# Altium PCB zb.PcbDoc
Units mm, origin at the board's own origin, x right, y up, seen from the top; angles counter-clockwise.
Board outline 100 x 74.47 mm, 5 copper layers (Top Layer, Mid-Layer 6, Mid-Layer 8, Mid-Layer 14, Bottom Layer); 42 components, 36 nets, 150 pads, 27 vias.
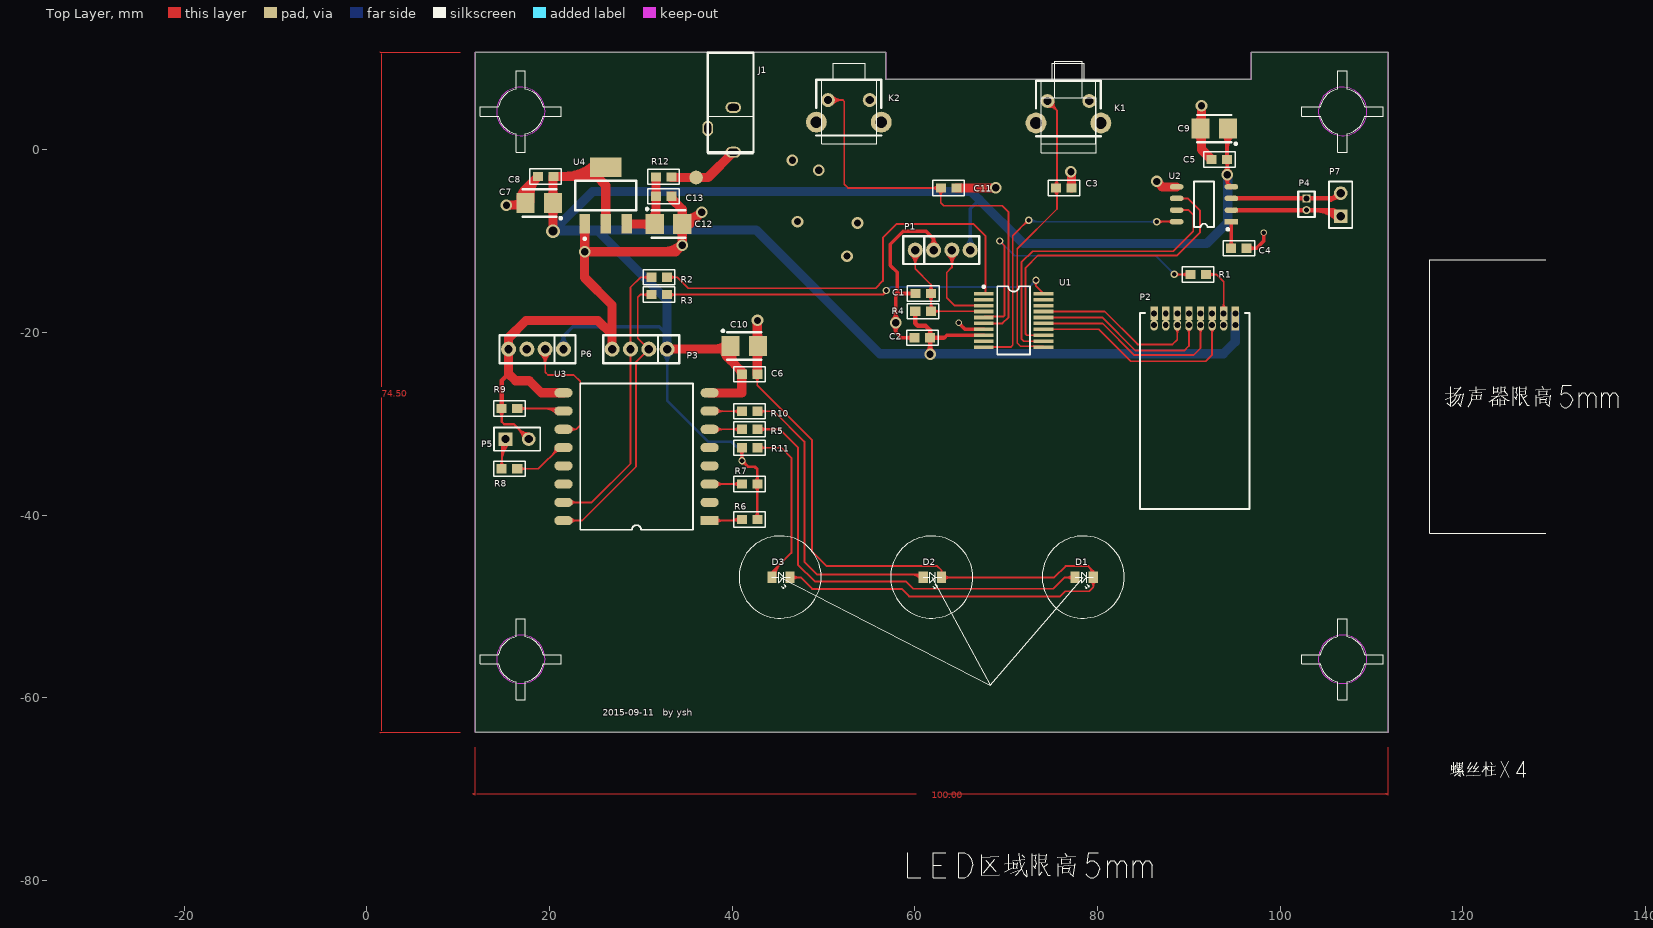
[diagram p0: Top Layer view]
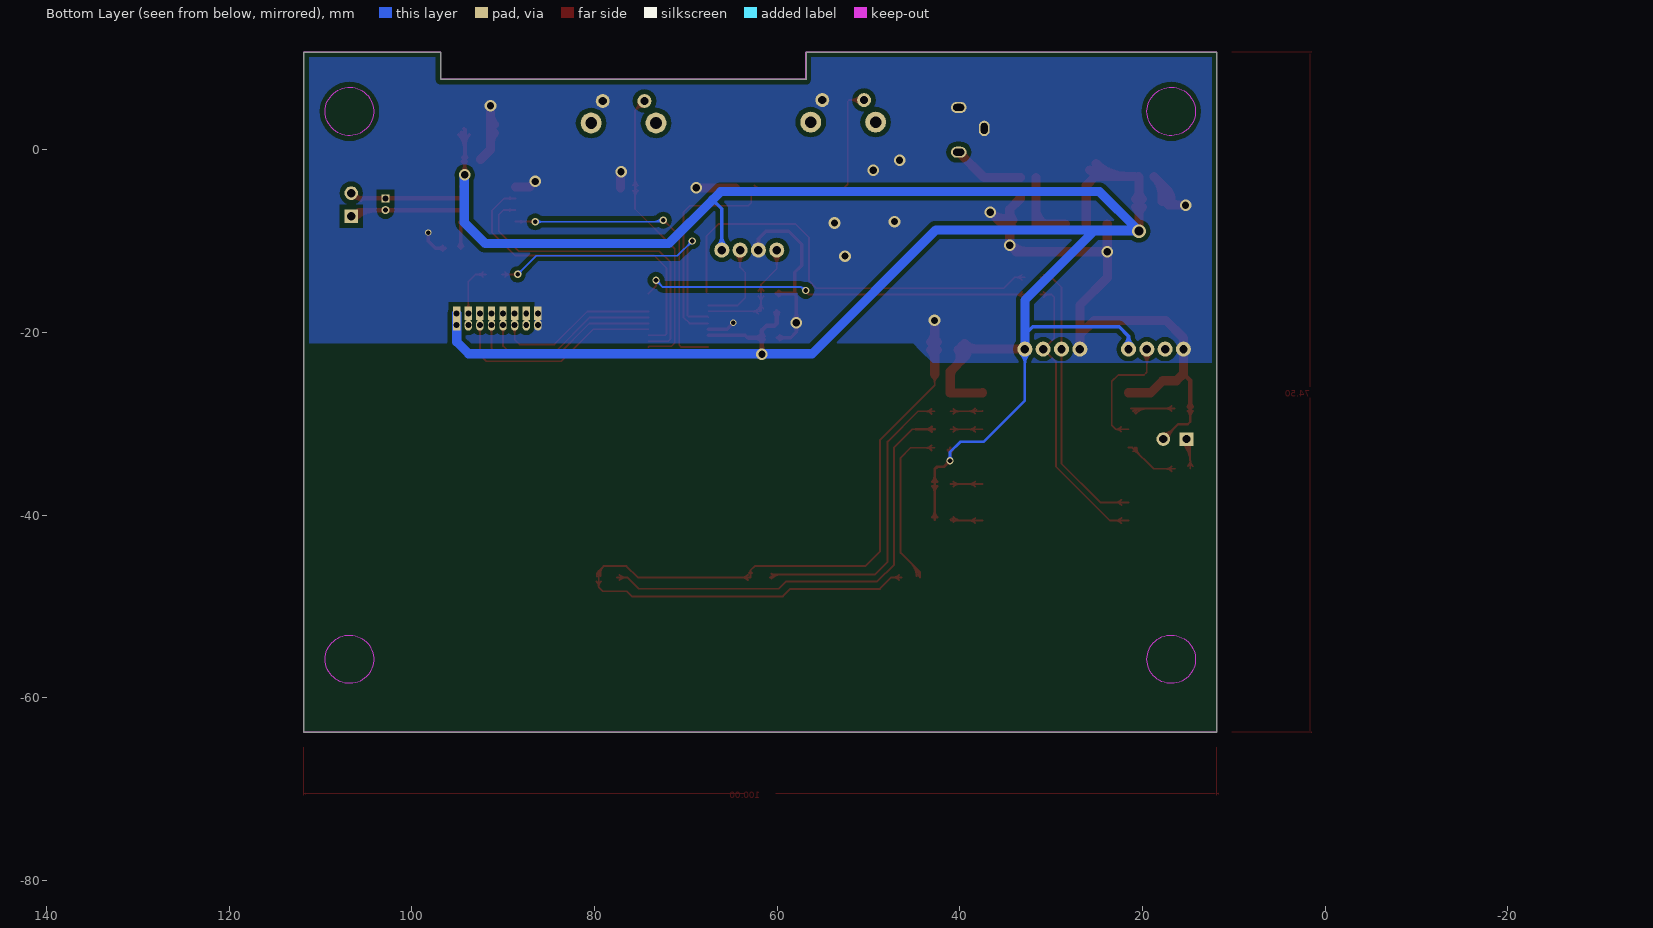
[diagram p1: Bottom Layer view, seen from below]
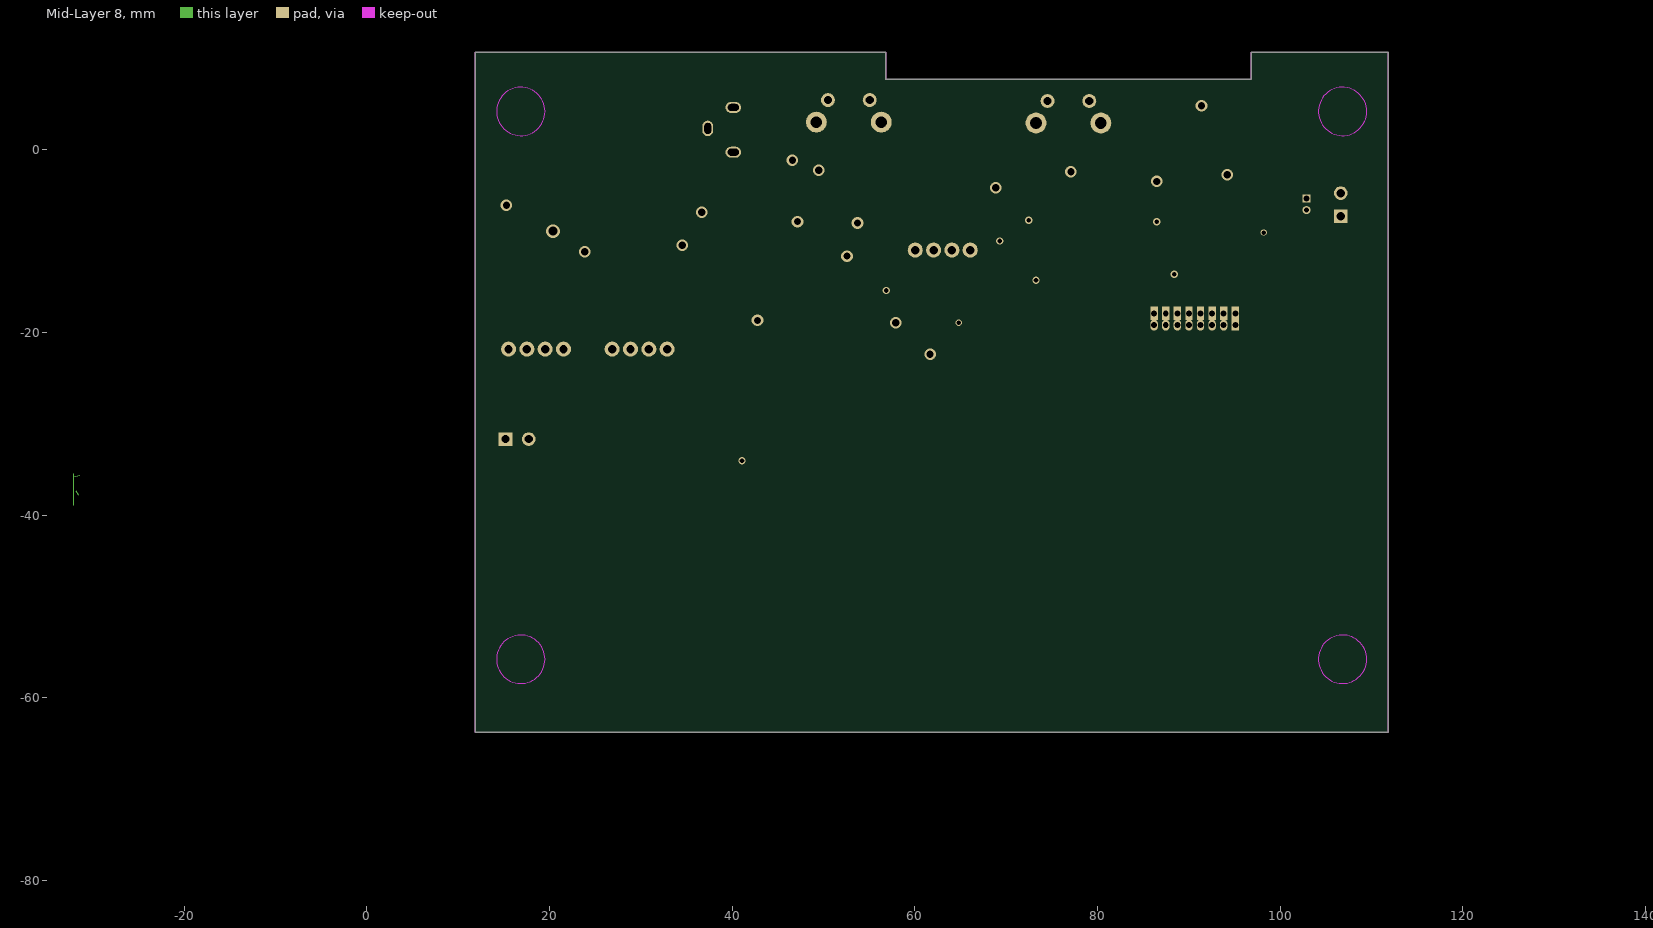
[diagram p2: Mid-Layer 8]
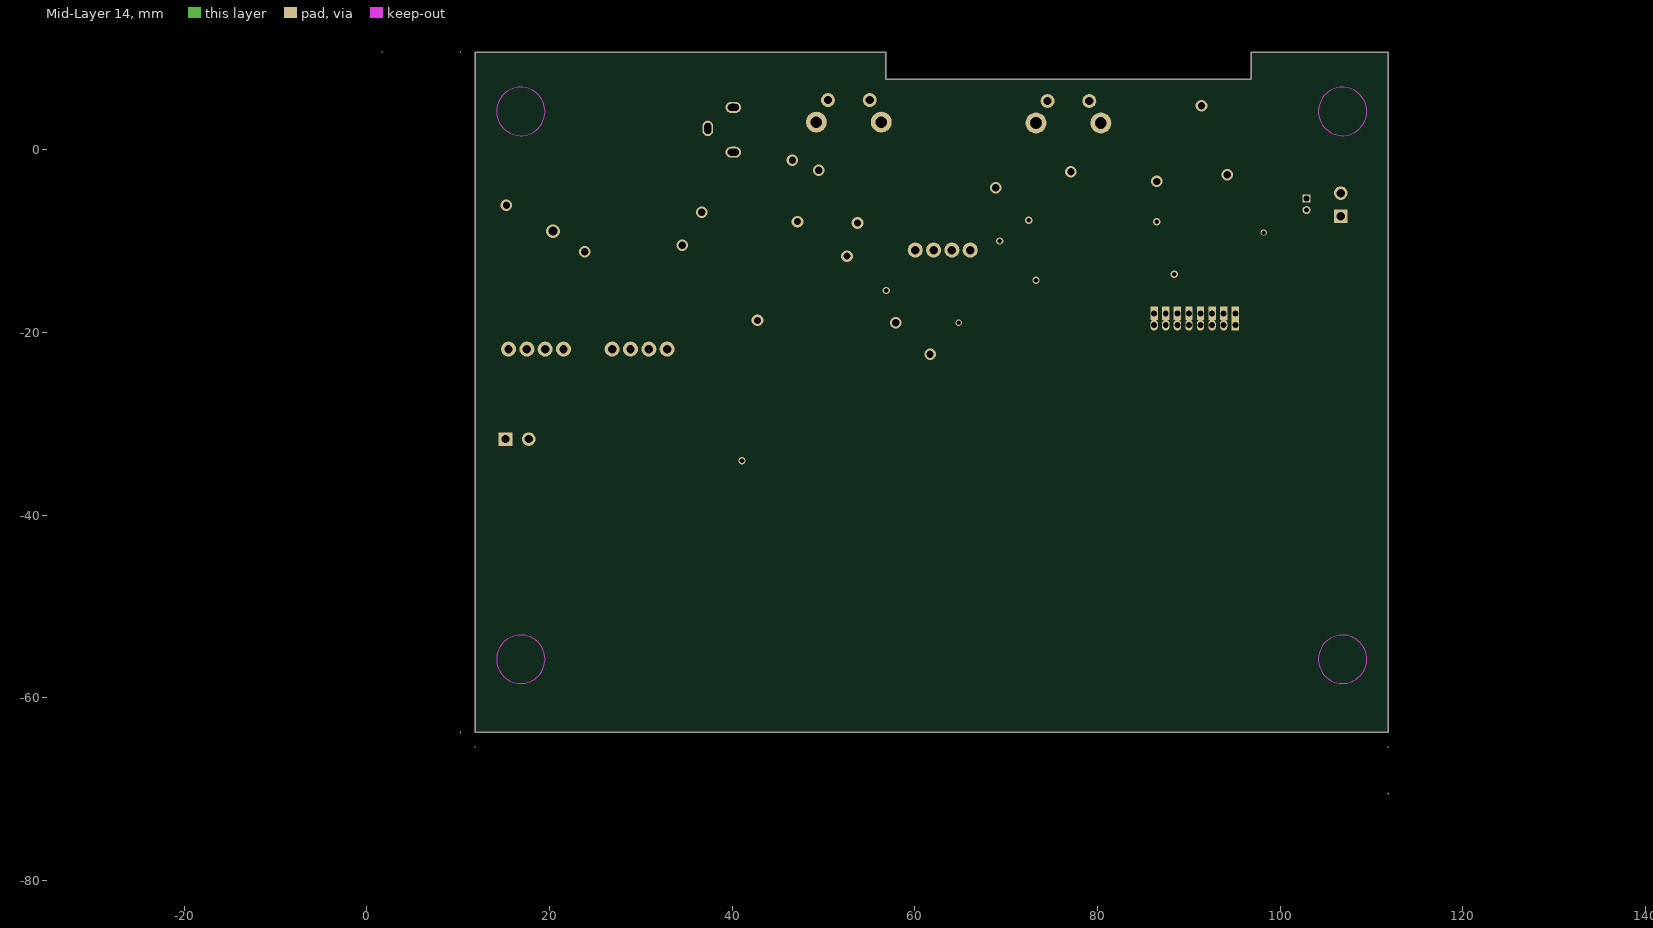
[diagram p3: Mid-Layer 14]

## Layer stack, top to bottom
Top Layer: signal copper 0.0356
Dielectric: dielectric 0.32, FR-4, Dk 4.8
Mid-Layer 6: signal copper 0.0356
Dielectric: dielectric 0.32, FR-4, Dk 4.8
Mid-Layer 8: signal copper 0.0356
Dielectric: dielectric 0.32, FR-4, Dk 4.8
Mid-Layer 14: signal copper 0.0356
Dielectric: dielectric 0.32, FR-4, Dk 4.8
Bottom Layer: signal copper 0.0356

## Board outline
11.9,10.675 56.8,10.675 56.8,7.775 56.825,7.75 56.85,7.725 96.85,7.725 96.85,10.7 111.85,10.7 111.85,-63.775 11.85,-63.775 11.85,10.675 11.9,10.675

## Design rules (kind name [scope] priority, off if disabled: settings)
Clearance [All] p1: gap=0.508
PlaneConnect [All] p1: planeconnectstyle=Direct reliefexpansion=0.508 reliefentries=4 reliefconductorwidth=0.254 reliefairgap=0.254
PolygonConnect [All] p1: connectstyle=Direct reliefconductorwidth=0.254 reliefentries=4 polygonreliefangle="90 Angle"
RoomDefinition ts [InComponentClass('ts')] p1: confinementstyle=ConfineIn formatcopy=TRUE lockcomponents=FALSE outline 147.066,-86.741 154.432,-86.741 154.432,-74.549 147.066,-74.549
RoutingVias [All] p1: holewidth=0.711 width=1.27 viastyle="Through Hole" minholewidth=0.711 minwidth=1.27 maxholewidth=0.711 maxwidth=1.27
SilkscreenOverComponentPads [All] p1: minsilkscreentomaskgap=0.254
SolderMaskExpansion [All] p1: expansion=0.102
TestPointUsage [All] p1: valid=0 allowmultiple=FALSE
Testpoint [All] p1: side=15 testpointundercomponent=TRUE minsize=1.016 maxsize=2.54 preferedsize=1.524 minholesize=0 maxholesize=1.016 preferedholesize=0.813 testpointgrid=0.025 style=1023 order=0-112345678
Width [All] p1: maxlimit=1 minlimit=0.2 preferedwidth=0.254
22 further rules are at their usual default settings.

## Components (designator, comment, footprint, x,y, rotation, side; value= is the part's Value field where it differs from the comment)
C1 "104" 0603 60.925,-15.725 r0 top
C2 "104" 0603 60.825,-20.575 r0 top
C3 "104" 0603 76.325,-4.175 r180 top
C4 "104" 0603 95.5,-10.775 r0 top
C5 "104" 0603 93.35,-1.05 r0 top
C6 "104" 0603 41.9,-24.575 r180 top
C7 "20uF/10V" T3528 18.875,-5.825 r180 top
C8 "104" 0603 19.575,-2.925 r180 top
C9 "20uF/10V" T3528 92.8,2.325 r180 top
C10 "20uF/10V" T3528 41.325,-21.475 r0 top
C11 "104" 0603 63.7,-4.175 r180 top
C12 "20uF/10V" T3528 33.025,-8.125 r0 top
C13 "104" 0603 32.5,-5.075 r0 top
D1 "LED0" LED2 77.55,-46.825 r0 top
D2 "LED0" LED2 60.925,-46.825 r0 top
D3 "LED0" LED2 44.35,-46.825 r0 top
J1 "Header 3" DC3.5 42.325,10.65 r270 top
K1 "SET" KEY_1 76.825,4.15 r0 top
K2 "SET" KEY_1 52.775,4.25 r0 top
P1 "Header 4" PIN4-2.0 60.05,-10.975 r0 top
P2 "Header 8H" "PIN 1.27*8" 84.65,-17.875 r270 top
P3 "Header 4" PIN4-2.0 32.875,-21.825 r180 top
P4 "Speaker" J-2-50 102.9,-5.95 r270 top
P5 "Header 2H" HDR1X2 15.175,-31.675 r0 top
P6 "Header 4" PIN4-2.0 21.525,-21.825 r180 top
P7 "Header 2H" HDR1X2 106.65,-7.275 r90 top
R1 "0R" 0603 91.025,-13.65 r180 top
R2 "0R" 0603 32,-13.95 r180 top
R3 "0R" 0603 32,-15.85 r180 top
R4 "10K" 0603 60.9,-17.675 r180 top
R5 "1K" 0603 41.9,-30.6 r180 top
R6 "10K" 0603 41.9,-40.475 r0 top
R7 "10K" 0603 41.9,-36.6 r180 top
R8 "10K" 0603 15.608,-34.925 r0 top
R9 "10K" 0603 15.608,-28.325 r180 top
R10 "1K" 0603 41.9,-28.625 r180 top
R11 "1K" 0603 41.9,-32.625 r180 top
R12 "1R" 0603 32.5,-2.95 r0 top
U1 "STM8L101XX_TSSOP20" SSOP20 70.825,-18.675 r270 top
U2 "DKA120" SO8(SOIC) 91.675,-5.95 r90 top
U3 "ESP-12X MOD" ESP12 37.525,-40.6 r180 top
U4 "HT1117-3.3" SOT-223 26.15,-5 r0 top

## Footprints (in the part's own frame and the unit in brackets; to place one, negate y for a bottom-side part, rotate by r counter-clockwise, add the part's x,y. Pads: shape width x height; smd on the part's side, far side on the other; paste and mask are expansions set on the pad)
0603 [mm] "Chip Resistor; Body 1.6 x 0.8 mm (LxW typ)"
  rect 1.1x1 smd: 1(-0.85,0) 2(0.85,0)
  silkscreen extent -1.73,-0.84 1.73,0.84
DC3.5 [mm]
  oval 1.2x1.7 hole 0.762 slot 1.2 at 90 deg: 1(10.9,-2.2) 3(6,-2.2)
  oval 1.7x1.2 hole 0.762 slot 1.2 at 0 deg: 2(8.3,-5)
  silkscreen extent 0,-5 10.9,0
ESP12 [mm]
  rect 2x1 smd: 1(0,0)
  oval 2x1 smd: 2(0,-2) 3(0,-4) 4(0,-6) 5(0,-8) 6(0,-10) 7(0,-12) 8(0,-14) 9(16,-14) 10(16,-12) 11(16,-10) 12(16,-8) 13(16,-6) 14(16,-4) 15(16,-2) 16(16,0)
  silkscreen extent 1.84,-15 14.17,1
HDR1X2 [mm] "Connector; Header; 2 Position"
  rect 1.5x1.5 hole 0.9: 1(0,0)
  round 1.5 hole 0.9: 2(2.54,0)
  silkscreen extent -1.27,-1.27 3.81,1.27
J-2-50 [mil]
  rect 35x35 hole 25: 1(-25,0)
  round 35 hole 20: 2(25,0)
  silkscreen extent -55,-35 55,35
KEY_1 [mil]
  round 60 hole 35: 1(-90,47.5) 2(90,47.5)
  round 90 hole 50: ""(-140,-47.5) ""(140,-47.5)
  silkscreen extent -140,-105 140,135
LED2 [mm]
  rect 1x1.27 smd: 1(0,0) 2(2,0)
  silkscreen extent 0,-1.2 2,0.56
PIN4-2.0 [mil]
  round 65 hole 36: 1(0,0) 2(79,0) 3(158,0) 4(237,0)
  silkscreen extent -52,-60 276,60
"PIN 1.27*8" [mm]
  rect 1.5x0.8 hole 0.65: 1(0.023,10.453) 2(0.023,9.183) 3(0.023,7.913) 4(0.023,6.643) 5(0.023,5.373) 6(0.023,4.103) 7(0.023,2.833) 8(0.023,1.563)
  rect 1.2x0.8 hole 0.65: 1(1.323,10.453)
  oval 1.2x0.8 hole 0.65: 2(1.323,9.183) 3(1.323,7.913) 4(1.323,6.643) 5(1.323,5.373) 6(1.323,4.103) 7(1.323,2.833) 8(1.323,1.563)
  silkscreen extent -0.01,0 21.46,12.01
SO8(SOIC) [mm] "Small Outline; 8 Leads; Body Width 3.9 mm; Pitch 1.27 mm"
  rect 0.6x1.5 smd: 1(-1.905,-3)
  oval 0.6x1.5 smd: 2(-0.635,-3) 3(0.635,-3) 4(1.905,-3) 5(1.905,3) 6(0.635,3) 7(-0.635,3) 8(-1.905,3)
  silkscreen extent -2.88,-2.72 2.5,1.1
SOT-223 [mm] "SOT-223/SC-73; 4 Leads; Body 6.7 x 7.3 mm, inc. leads (LxW max)"
  rect 1.1x2.15 smd: 1(-2.3,-3.1) 2(0,-3.1) 3(2.3,-3.1)
  rect 3.5x2.15 smd: 2(0,3.1)
  silkscreen extent -3.35,-4.85 3.35,1.63
SSOP20 [mm] "SSOP, Plastic; 20 Leads; Body Width 5.3 mm; Pitch 0.65 mm"
  rect 0.4x2.15 smd: 1(-2.925,-3.275) 2(-2.275,-3.275) 3(-1.625,-3.275) 4(-0.975,-3.275) 5(-0.325,-3.275) 6(0.325,-3.275) 7(0.975,-3.275) 8(1.625,-3.275) 9(2.275,-3.275) 10(2.925,-3.275) 11(2.925,3.275) 12(2.275,3.275) 13(1.625,3.275) 14(0.975,3.275) 15(0.325,3.275) 16(-0.325,3.275) 17(-0.975,3.275) 18(-1.625,3.275) 19(-2.275,3.275) 20(-2.925,3.275)
  silkscreen extent -3.8,-3.4 3.75,1.8
T3528 [mm] "Capacitor, SM Tantalum; Body 3.5 x 2.8 mm (LxW typ)"
  rect 2x2.2 smd: 1(-1.5,0) 2(1.5,0)
  silkscreen extent -2.46,-1.5 1.85,1.78

## Part data
C1 C2: library part CAP, "Capacitor"
C3 C4 C5 C6 C8 C11 C13: library part "Cap Semi", "Capacitor (Semiconductor SIM Model)"
C7 C9 C10 C12: library part "Cap Pol3", "Polarized Capacitor (Surface Mount)"
D1: library part 1N4044, "275 Amp Avg Power Silicon Rectifier Diode"
D2 D3: "Typical INFRARED GaAs LED"
J1: library part Phonejack2, "Jack Socket, 1/4\" [6.5mm], Thru-Hole, Vertical, 2-Conductor Open Circuit"
K1 K2: library part SW-PB, "Switch"
P1 P3 P6: "Header, 4-Pin"
P2: "Header, 8-Pin, Right Angle"
P4: "Loudspeaker"
P5 P7: "Header, 2-Pin, Right Angle"
R1 R2 R3 R4 R5 R6 R7 R8 R9 R10 R11 R12: library part RES-SM
U1: library part STM8L101
U3: library part "ESP8266 MOD"

## Free pads (board coordinates)
  round 1.5 smd: 0(36.05,-3.025)

## Via types
v1: diameter 1.27, hole 0.8, Top Layer to Bottom Layer, tented both sides, 17 vias
v2: diameter 0.8, hole 0.5, Top Layer to Bottom Layer, tented both sides, 7 vias
v3: diameter 0.7, hole 0.5, Top Layer to Bottom Layer, 1 vias
v4: diameter 0.7, hole 0.5, Top Layer to Bottom Layer, tented both sides, 1 vias
v5: diameter 1.5, hole 1, Top Layer to Bottom Layer, tented both sides, 1 vias

## Nets (pads, with @x,y where several pads share a name; then routed paths per layer and width w, separated by ;. In a path a pad name is that pad's centre, name@x,y a point inside that pad or via, vN(x,y) a via of type N, cw(c..) or ccw(c..) an arc to the next point about the centre after c; other vN are vias at no path point)
3V3: C2.2 C5.2 C6.2 C7.1 C8.1 C9.1 C10.1 P1.4 P2.1 P3.1 P6.1 R4.2 R6.2 R7.1 R11.2 U1.8 U2.4 U3.8 U4.2 | length 338.1
  Top Layer w0.3: R11.2@40.803,-32.872 cw(c40.205,-33.47) 41.05,-33.47 cw(c41.895,-33.47) R11.2@41.297,-32.872 ; v2@40.898,-33.873 ccw(c40.532,-33.507) 41.05,-33.507 ; 41.05,-33.386 ccw(c41.739,-33.386) v2@41.252,-33.873 ; R11.2 41.05,-34.025 v2(41.075,-34.05) 41.725,-34.7 42.475,-34.7 42.75,-34.975 R7.1 R6.2 ; v2@41.075,-34.3 cw(c41.075,-34.904) 41.502,-34.477 cw(c41.929,-34.05) v2@41.325,-34.05 ; R6.2@42.503,-40.228 ccw(c41.905,-39.63) 42.75,-39.63 ccw(c43.595,-39.63) R6.2@42.997,-40.228 ; R7.1@42.503,-36.847 cw(c41.905,-37.445) 42.75,-37.445 cw(c43.595,-37.445) R7.1@42.997,-36.847 ; R7.1@42.503,-36.353 ccw(c41.905,-35.755) 42.75,-35.755 ccw(c43.595,-35.755) R7.1@42.997,-36.353
  Top Layer w0.4: C10.1@39.475,-21.825 C10.1 ; 63.25,-20.55 63.5,-20.3 U1.8 ; C9.1@93.734,1.659 cw(c92.61,0.535) 94.2,0.535 ; v1@93.917,-2.417 ccw(c93.175,-1.675) 94.225,-1.675 ccw(c95.275,-1.675) v1@94.533,-2.417 ; v1@93.964,-3.073 cw(c93.573,-3.595) 94.225,-3.595 ; C5.2@93.988,-0.838 ccw(c93.476,-0.326) 94.2,-0.326 ccw(c94.924,-0.326) C5.2@94.412,-0.838 ; C5.2@94.038,-1.262 cw(c93.586,-1.714) 94.225,-1.714 ; 94.2,0.052 cw(c96.473,0.052) C9.1@94.866,1.659 ; 94.2,1.018 cw(c95.507,1.018) C9.1@94.583,1.942 ; 94.225,-1.835 cw(c95.035,-1.835) C5.2@94.462,-1.262 ; C9.1 94.2,2.225 C5.2 94.225,-1.075 v1(94.225,-2.725) 94.225,-3.595 ; U2.4@94.43,-3.8 cw(c94.197,-4.034) U2.4@94.504,-4.156 ; v1@94.486,-3.073 ccw(c94.877,-3.595) 94.225,-3.595 ; U2.4 94.225,-3.595
  Top Layer w0.5: R4.2@59.873,-17.852 cw(c59.446,-18.279) 60.05,-18.279 cw(c60.654,-18.279) R4.2@60.227,-17.852 ; R4.2 60.05,-19 60.325,-19.275 61.175,-19.275 61.675,-19.775 C2.2 ; v1@61.403,-22.103 ccw(c60.746,-21.446) 61.675,-21.446 ccw(c62.604,-21.446) v1@61.947,-22.103 ; C2.2@61.498,-20.752 cw(c61.071,-21.179) 61.675,-21.179 cw(c62.279,-21.179) C2.2@61.852,-20.752 ; C2.2@61.498,-20.398 ccw(c61.071,-19.971) 61.675,-19.971 ccw(c62.279,-19.971) C2.2@61.852,-20.398 ; v1@61.675,-22.35 C2.2 ; C2.2@61.902,-20.752 cw(c62.329,-21.179) 62.329,-20.575 cw(c62.329,-19.971) C2.2@61.902,-20.398 ; 63.15,-20.575 C2.2
  Top Layer w1: C7.1@20.021,-6.279 cw(c19.168,-7.132) 20.375,-7.132 cw(c21.582,-7.132) C7.1@20.729,-6.279 ; C7.1@20.021,-5.371 ccw(c19.168,-4.518) 20.375,-4.518 ccw(c21.582,-4.518) C7.1@20.729,-5.371 ; v5(20.375,-8.9) 20.375,-2.975 C8.1 ; C8.1@20.825,-2.9 25.15,-2.9 26.15,-3.9 U4.2@26.15,-8.1 ; 21.673,-2.9 ccw(c21.673,1.902) U4.2@25.068,-1.493 ; 24.087,-2.9 ccw(c24.087,-0.512) U4.2@25.776,-2.201 ; P3.1 C10.1@39.475,-21.825 ; U3.8 37.55,-26.625 41.05,-26.625 C6.2 41.05,-24.275 39.825,-23.05 C10.1 ; 38.014,-21.825 ccw(c38.014,-19.764) C10.1@39.471,-21.221 ; C10.1@39.433,-21.265 ccw(c40.306,-21.956) 39.519,-22.744 ; C10.1@40.217,-21.885 ccw(c41.192,-22.658) 40.312,-23.537 ; 40.753,-23.978 cw(c40.155,-24.575) C6.2@41,-24.575 ; 39.825,-22.782 cw(c41.032,-22.782) 40.179,-21.929 ccw(c41.032,-22.782) 39.825,-22.782 ; 39.825,-22.782 ccw(c38.618,-22.782) 39.471,-21.929 cw(c38.618,-22.782) 39.825,-22.782
  Bottom Layer w0.3: P3.1@32.397,-22.303 cw(c31.244,-23.456) 32.875,-23.456 cw(c34.506,-23.456) P3.1@33.353,-22.303 ; P3.1@32.609,-22.091 cw(c31.968,-22.732) 32.875,-22.732 cw(c33.782,-22.732) P3.1@33.141,-22.091 ; P3.1 32.875,-27.425 37.425,-31.975 39.95,-31.975 41.075,-33.1 v2(41.075,-34.05) ; v2@40.898,-33.873 ccw(c40.471,-33.446) 41.075,-33.446 ccw(c41.679,-33.446) v2@41.252,-33.873
  Bottom Layer w0.4: P6.1@21.102,-21.365 ccw(c20.215,-20.4) 21.525,-20.4 ; P6.1 21.525,-20.4 ; P6.1@21.948,-21.365 cw(c22.835,-20.4) 21.525,-20.4 ; 32.875,-20.225 32.025,-19.375 22.55,-19.375 21.525,-20.4 ; P1.4@65.628,-10.533 ccw(c64.56,-9.465) 66.07,-9.465 ccw(c67.58,-9.465) P1.4@66.512,-10.533 ; P1.4 66.07,-6.455 67.075,-5.45
  Bottom Layer w1: v5@20.2,-8.875 25.275,-8.875 32.875,-16.475 32.875,-20.225 ; v5(20.375,-8.9) v5@20.518,-8.757 ; v5@20.552,-9.077 cw(c21.324,-9.849) 21.324,-8.757 ; P3.1 32.875,-20.225 ; 32.875,-18.85 32.875,-20.225 ; v1@94.275,-2.725 94.275,-7.95 91.975,-10.25 71.875,-10.25 67.075,-5.45 66.2,-4.575 24.7,-4.575 v5@20.518,-8.757 ; P2.1@95.103,-17.898 95.103,-19.198 95.103,-21.022 93.8,-22.325 56.175,-22.325 42.607,-8.757 v5@20.518,-8.757
  other v1: 61.675,-22.375
DKA_BUSY: U1.10 U2.8 | length 39.7
  Top Layer w0.2: U1.10 70.5,-21.6 70.733,-21.367 70.733,-9.392 v2@72.4,-7.725 ; 71.878,-8.247 cw(c72.475,-8.845) v2@72.475,-8 ; 71.998,-8.127 ccw(c71.571,-7.7) v2@72.175,-7.7 ; v2@86.52,-7.855 U2.8 ; v2@86.712,-8.087 cw(c87.273,-8.648) 87.273,-7.855 ; v2@86.712,-7.663 ccw(c87.176,-7.199) 87.176,-7.855 ; U2.8@88.084,-7.996 ccw(c87.742,-8.338) 87.742,-7.855 ccw(c87.742,-7.372) U2.8@88.084,-7.714
  Bottom Layer w0.2: v2(72.475,-7.7) 72.65,-7.875 v2(86.5,-7.875) ; v2@72.546,-7.629 ccw(c73.139,-7.036) 73.139,-7.875 ; v2@72.687,-7.488 ccw(c73.622,-6.553) 73.622,-7.875 ; v2@86.288,-8.087 ccw(c85.776,-8.599) 85.776,-7.875 ccw(c85.776,-7.151) v2@86.288,-7.663
DKA_RET: U1.13 U2.6 | length 36.3
  Top Layer w0.2: U1.13 72.275,-20.3 72.133,-20.158 72.133,-12.917 73.496,-11.554 88.746,-11.554 91.225,-9.075 91.225,-6.625 89.915,-5.315 U2.6 ; U2.6@89.266,-5.456 cw(c89.608,-5.798) 89.608,-5.315 cw(c89.608,-4.832) U2.6@89.266,-5.174
DKA_SD: U1.12 U2.7 | length 35.7
  Top Layer w0.2: U1.12 71.925,-20.95 71.679,-20.704 71.679,-12.321 72.9,-11.1 88.3,-11.1 90.5,-8.9 90.5,-7.1 89.985,-6.585 U2.7 ; U2.7@89.266,-6.726 cw(c89.608,-7.068) 89.608,-6.585 cw(c89.608,-6.102) U2.7@89.266,-6.444
DTX: P6.2 U3.11 | length 19.7
  Top Layer w0.2: P6.2@19.005,-22.338 cw(c17.767,-23.577) 19.518,-23.577 cw(c21.27,-23.577) P6.2@20.031,-22.338 ; P6.2@19.147,-22.197 cw(c18.25,-23.094) 19.518,-23.094 cw(c20.787,-23.094) P6.2@19.89,-22.197 ; P6.2@19.518,-21.775 19.518,-24.343 19.825,-24.65 22.65,-24.65 23.35,-25.35 23.35,-30.175 22.925,-30.6 ; U3.11 22.925,-30.6 ; U3.11@22.322,-30.868 cw(c22.925,-31.412) 22.925,-30.6 ; U3.11@22.322,-30.332 ccw(c22.925,-29.788) 22.925,-30.6
GDO0: P2.2 R1.1 | length 8.4
  Top Layer w0.2: R1.1 93.05,-13.65 93.833,-14.433 P2.2@93.833,-17.898 ; R1.1@92.208,-13.933 cw(c92.891,-14.616) 92.891,-13.65 cw(c92.891,-12.684) R1.1@92.208,-13.367 ; P2.2@93.621,-17.336 ccw(c93.109,-16.824) 93.833,-16.824 ccw(c94.557,-16.824) P2.2@94.045,-17.336
GDO2: P2.7
GND: C1.1 C2.1 C3.1 C4.2 C5.1 C6.1 C7.2 C8.2 C9.2 C10.2 C11.1 C12.2 C13.2 D1.2 D2.2 D3.2 J1.2 J1.3 K1.2 K2.2 P1.2 P2.8 P3.4 P5.2 P6.4 R9.2 U1.7 U2.5 U3.9 U4.1 | length 260.3
  Top Layer w0.2: C6.1@42.467,-24.858 cw(c41.784,-25.541) 42.75,-25.541 cw(c43.716,-25.541) C6.1@43.033,-24.858 ; C6.1 42.75,-25.798 48.75,-31.798 48.75,-44 50.35,-45.6 50.368,-45.582 62.463,-45.582 62.925,-46.044 ; D3.2 47.5,-46.825 48.75,-48.075 58.55,-48.075 59.375,-48.9 75.925,-48.9 76.487,-48.338 79.112,-48.338 79.55,-47.9 D1.2 79.55,-46.125 ; D3.2@46.633,-47.108 cw(c47.316,-47.791) 47.316,-46.825 cw(c47.316,-45.859) D3.2@46.633,-46.542 ; D2.2@62.747,-46.332 ccw(c62.604,-46.044) 62.925,-46.044 ; D2.2@62.933,-46.817 D2.2 ; D2.2@63.103,-46.332 cw(c63.246,-46.044) 62.925,-46.044 ; D2.2@63.208,-47.108 cw(c63.891,-47.791) 63.891,-46.825 cw(c63.891,-45.859) D2.2@63.208,-46.542 ; 79.002,-45.577 cw(c78.117,-46.461) D1.2@79.353,-46.658 ; D1.2@79.273,-47.248 cw(c78.646,-47.9) 79.55,-47.9 cw(c80.454,-47.9) D1.2@79.827,-47.248 ; 79.279,-45.854 cw(c78.595,-46.538) D1.2@79.55,-46.69 ; D1.2@79.417,-46.313 ccw(c79.351,-46.125) 79.55,-46.125 ; 79.556,-46.131 cw(c79.073,-46.614) D1.2@79.748,-46.722 ; D1.2@79.683,-46.313 cw(c79.749,-46.125) 79.55,-46.125 ; D2.2 62.925,-46.044 ; D2.2 75.275,-46.825 76.518,-45.582 79.007,-45.582 79.55,-46.125
  Top Layer w0.254: R9.2@14.495,-28.589 cw(c13.858,-29.225) 14.758,-29.225 cw(c15.659,-29.225) R9.2@15.022,-28.589 ; R9.2 14.758,-29.783 15.025,-30.05 16.09,-30.05 P5.2 ; P5.2@17.092,-31.675 ccw(c15.588,-31.675) 16.651,-30.611 ccw(c17.715,-29.548) P5.2@17.715,-31.052 ; P5.2@17.346,-31.675 ccw(c16.455,-31.675) 17.085,-31.045 ccw(c17.715,-30.415) P5.2@17.715,-31.306
  Top Layer w0.4: v1@57.592,-18.617 ccw(c56.85,-17.875) 57.9,-17.875 ccw(c58.95,-17.875) v1@58.208,-18.617 ; v1@57.598,-19.238 cw(c56.91,-19.95) 57.9,-19.95 ; 58,-15.725 C1.1 ; v1@58.202,-19.238 ccw(c58.89,-19.95) 57.9,-19.95 ; C2.1@59.713,-20.787 ccw(c59.201,-21.299) 59.201,-20.575 ccw(c59.201,-19.851) C2.1@59.713,-20.363 ; C1.1@59.813,-15.937 ccw(c59.301,-16.449) 59.301,-15.725 ccw(c59.301,-15.001) C1.1@59.813,-15.513 ; C2.1 58.525,-20.575 57.9,-19.95 ; P1.2@61.684,-10.473 ccw(c61.134,-9.732) 62.057,-9.732 ; P1.2 62.057,-9.732 ; P1.2@62.429,-10.473 cw(c62.98,-9.732) 62.057,-9.732 ; v3@64.875,-19.025 65.5,-19.65 U1.7 ; v3@64.975,-18.95 ccw(c65.397,-18.95) 65.099,-19.249 ; C4.2 97.425,-10.775 98.225,-9.975 v4(98.225,-9.05) ; C4.2@96.612,-10.987 cw(c97.124,-11.499) 97.124,-10.775 cw(c97.124,-10.051) C4.2@96.612,-10.563 ; v4@98.119,-9.156 cw(c97.863,-9.412) 98.225,-9.412 cw(c98.587,-9.412) v4@98.331,-9.156 ; 57.9,-19.95 57.9,-16.042 58.083,-15.859 58.083,-13.408 57.325,-12.65 57.325,-10.325 58.742,-8.908 61.233,-8.908 62.057,-9.732
  Top Layer w0.5: R9.2@14.582,-28.148 ccw(c14.155,-27.721) 14.758,-27.721 ccw(c15.362,-27.721) R9.2@14.935,-28.148 ; R9.2 14.758,-25.252 15.505,-24.505
  Top Layer w1: v1(15.275,-6.05) C7.2@17.15,-6.05 ; v1@15.866,-6.05 ccw(c15.866,-4.416) C7.2@17.021,-5.571 ; C7.2@16.882,-5.811 cw(c18.591,-5.512) 17.365,-4.285 ; C7.2@17.021,-5.371 ccw(c16.168,-4.518) 17.375,-4.518 ccw(c18.582,-4.518) C7.2@17.729,-5.371 ; C7.2 17.375,-4.275 C8.2 ccw(c20.907,-5.107) C7.2@17.868,-5.639 ; U3.9 19.1,-26.6 17.775,-25.275 16.275,-25.275 15.505,-24.505 P6.4 15.505,-20.595 17.4,-18.7 25.3,-18.7 26.855,-20.255 ; v1(23.85,-11.15) 33.825,-11.15 v1(34.525,-10.45) C12.2 ; U4.1 23.85,-10.775 23.825,-10.8 23.825,-13.975 26.855,-17.005 26.855,-20.255 ; P3.4 26.855,-20.255 ; 32.509,-11.15 ccw(c32.509,-8.434) v1@34.43,-10.355 ; C13.2 33.35,-5.325 34.525,-6.5 C12.2 ; C13.2@33.4,-5.075 ccw(c34.124,-5.075) 33.612,-5.587 ; C12.2@34.171,-8.579 cw(c33.318,-9.432) 34.525,-9.432 cw(c35.732,-9.432) C12.2@34.879,-8.579 ; C12.2@34.171,-7.671 ccw(c33.318,-6.818) 34.525,-6.818 ccw(c35.732,-6.818) C12.2@34.879,-7.671 ; C12.2@34.588,-7.529 ccw(c34.902,-5.077) v1(36.65,-6.825) 35.35,-8.125 C12.2 ; C10.2@42.471,-21.929 cw(c41.799,-22.601) 42.75,-22.601 ; C10.2@42.471,-21.021 ccw(c41.799,-20.349) 42.75,-20.349 ; C6.1 v1@42.75,-18.675 ; 42.75,-22.963 cw(c44.213,-22.963) C10.2@43.179,-21.929 ; 42.75,-19.987 ccw(c44.213,-19.987) C10.2@43.179,-21.021 ; C11.1 v1@68.875,-4.175 ; C3.1 v1@77.175,-2.45 ; v1(86.5,-3.45) 87.095,-4.045 U2.5 ; C9.2@90.946,1.871 cw(c89.851,0.776) 91.4,0.776 ; C9.2@90.946,2.779 ccw(c89.851,3.874) 91.4,3.874 ; v1(91.4,4.825) 91.4,0.05 C5.1
  other v1: 57.9,-18.925 42.775,-18.675 52.575,-11.625 53.725,-8 47.15,-7.85 68.85,-4.15 77.1,-2.4 49.475,-2.225 46.6,-1.125
  other v3: 64.825,-18.95
NetC3_2: C3.2 K1.1 U1.11 | length 39.8
  Top Layer w0.2: U1.11 74.004,-21.504 71.579,-21.504 71.225,-21.15 71.225,-10.825 75.575,-6.475 75.575,3.05 ; K1.1 75.575,4.32 ; K1.1@74.568,4.895 cw(c74.625,3.997) 75.262,4.634 cw(c75.899,5.27) K1.1@75,5.327 ; K1.1@74.581,4.696 cw(c74.663,3.408) 75.575,4.321 ; K1.1@75.2,5.315 ccw(c76.487,5.233) 75.575,4.321 ; C3.2@75.242,-4.458 cw(c74.439,-5.261) 75.575,-5.261 ; C3.2@75.242,-3.892 ccw(c74.439,-3.089) 75.575,-3.089 ; C3.2@75.384,-4.316 cw(c74.921,-4.779) 75.575,-4.779 ; C3.2@75.384,-4.034 ccw(c74.921,-3.571) 75.575,-3.571 ; 75.575,-5.02 cw(c76.37,-5.02) C3.2@75.808,-4.458 ; 75.575,-3.33 ccw(c76.37,-3.33) C3.2@75.808,-3.892 ; 75.575,3.246 75.575,3.05 ; 75.575,3.05 75.575,4.32
NetC4_1: C4.1 U2.1 | length 4.3
  Top Layer w0.4: C4.1@94.438,-10.563 ccw(c93.926,-10.051) 94.65,-10.051 ccw(c95.374,-10.051) C4.1@94.862,-10.563 ; C4.1 U2.1@94.65,-7.88 ; 94.65,-8.157 cw(c94.977,-8.157) U2.1@94.746,-7.926
NetC12_1: C12.1 C13.1 R12.1 U4.3 | length 11.8
  Top Layer w1: U4.3 28.475,-8.125 C12.1 ; C12.1@31.171,-8.479 ccw(c30.318,-9.332) 30.318,-8.125 ccw(c30.318,-6.918) C12.1@31.171,-7.771 ; C12.1@31.171,-7.671 ccw(c30.016,-6.516) 31.65,-6.516 ; C12.1@31.525,-8.5 31.65,-8.375 31.65,-5.25 R12.1@31.65,-3.025
NetD1_1: D1.1 R5.1 | length 53.1
  Top Layer w0.2: 44.85,-30.6 45.226,-30.6 47.196,-32.57 47.196,-43.602 ; 47.196,-43.704 47.196,-43.602 ; D1.1@77.267,-47.108 ccw(c76.584,-47.791) 76.584,-46.825 ccw(c76.584,-45.859) D1.1@77.267,-46.542 ; D1.1 76.425,-46.825 75.182,-48.068 59.817,-48.068 59.01,-47.261 49.043,-47.261 47.196,-45.414 47.196,-43.602
  Top Layer w0.254: R5.1 44.85,-30.6 ; R5.1@43.064,-30.864 cw(c43.7,-31.5) 43.7,-30.6 cw(c43.7,-29.7) R5.1@43.064,-30.336
NetD2_1: D2.1 R10.1 | length 37.5
  Top Layer w0.2: R10.1 44.576,-28.625 47.904,-31.953 47.904,-34.625 ; R10.1@43.083,-28.908 cw(c43.766,-29.591) 43.766,-28.625 cw(c43.766,-27.659) R10.1@43.083,-28.342 ; 47.904,-34.475 47.904,-34.625 ; 59.542,-46.517 cw(c59.542,-48.073) D2.1@60.642,-46.973 ; 60.024,-46.517 cw(c60.024,-47.591) D2.1@60.784,-46.831 ; 60.377,-46.517 ccw(c60.377,-46.142) D2.1@60.642,-46.407 ; D2.1@60.637,-46.413 cw(c60.392,-46.178) 60.392,-46.517 ; D2.1@60.7,-46.825 60.392,-46.517 ; 47.904,-34.625 47.904,-45.121 49.3,-46.517 60.392,-46.517
NetD3_1: D3.1 R11.1 | length 23.2
  Top Layer w0.2: R11.1 45.4,-32.625 46.488,-33.713 46.488,-44.137 44.35,-46.275 D3.1 ; R11.1@43.083,-32.908 cw(c43.766,-33.591) 43.766,-32.625 cw(c43.766,-31.659) R11.1@43.083,-32.342 ; D3.1@44.35,-46.69 cw(c45.352,-46.69) 44.643,-45.982 ; D3.1@44.55,-46.69 cw(c46.035,-46.69) 44.985,-45.64 ; D3.1@44.75,-46.69 cw(c46.718,-46.69) 45.326,-45.299
NetJ1_1: J1.1 pad.0 R12.2 | length 8.6
  Top Layer w1: R12.2@33.35,-3.025 37.35,-3.025 J1.1 ; 39.528,-0.847 ccw(c38.93,-0.25) J1.1@39.775,-0.25
NetP4_1: P4.1 P7.2 U2.3 | length 13.1
  Top Layer w0.5: U2.3 P4.1 105.745,-5.315 P7.2@106.475,-4.585 ; 105.583,-5.477 cw(c106.28,-6.175) P7.2@106.526,-5.219
NetP4_2: P4.2 P7.1 U2.2 | length 17
  Top Layer w0.5: U2.2 P4.2 105.885,-6.585 P7.1@106.675,-7.375 ; 103.777,-6.585 cw(c103.777,-10.148) P7.1@106.296,-7.629 ; 104.984,-6.585 cw(c104.984,-8.941) P7.1
NetP5_1: P5.1 R8.1 | length 12.3
  Top Layer w0.2: R8.1@14.476,-34.642 ccw(c13.793,-33.959) 14.758,-33.959 ccw(c15.724,-33.959) R8.1@15.041,-34.642 ; R8.1 P5.1@14.758,-32.092 ; 14.758,-34.25 cw(c17.75,-34.25) P5.1@15.635,-32.135 ; 14.758,-33.767 cw(c17.267,-33.767) P5.1@15.493,-31.993 ; 14.758,-33.284 cw(c16.784,-33.284) P5.1@15.352,-31.852 ; 14.758,-32.801 cw(c16.301,-32.801) P5.1@15.21,-31.71 ; P5.1@14.758,-32.319 cw(c15.819,-32.319) P5.1@15.069,-31.569
NetR2_1: R2.1 U1.1 | length 49.3
  Top Layer w0.2: R2.1 34,-13.95 35.192,-15.142 55.711,-15.142 56.5,-14.353 56.5,-9.6 58,-8.1 66.4,-8.1 67.75,-9.45 U1.1@67.75,-15.59 ; R2.1@33.183,-14.233 cw(c33.866,-14.916) 33.866,-13.95 cw(c33.866,-12.984) R2.1@33.183,-13.667 ; U1.1 U1.1@67.575,-15.75
NetR3_1: R3.1 U1.20 | length 47.8
  Top Layer w0.2: R3.1 56.525,-15.85 56.974,-15.401 v2(56.878,-15.401) ; R3.1@33.183,-16.133 cw(c33.866,-16.816) 33.866,-15.85 cw(c33.866,-14.884) R3.1@33.183,-15.567 ; v2@56.613,-15.541 cw(c56.416,-15.645) 56.573,-15.802 cw(c56.823,-16.051) v2@56.852,-15.7 ; v2@73.072,-14.496 cw(c72.701,-14.9) 73.25,-14.9 cw(c73.714,-14.9) v2@73.447,-14.52 ; v2@73.25,-14.325 73.25,-14.9 U1.20
  Bottom Layer w0.2: v2@56.976,-15.117 ccw(c57.102,-14.752) 57.375,-15.025 ; v2@57,-15.4 57.375,-15.025 ; v2@57.178,-15.401 cw(c57.609,-15.401) 57.304,-15.096 ; v2@72.975,-14.275 cw(c72.251,-14.275) 72.763,-14.787 cw(c73.275,-15.299) v2@73.275,-14.575 ; v2(73.275,-14.275) 72.525,-15.025 57.375,-15.025
NetR5_2: R5.2 U3.6 | length 6.6
  Top Layer w0.2: U3.6 R5.2 ; U3.6@38.308,-30.883 cw(c38.991,-31.566) 38.991,-30.6 cw(c38.991,-29.634) U3.6@38.308,-30.317 ; R5.2@40.717,-30.883 ccw(c40.034,-31.566) 40.034,-30.6 ccw(c40.034,-29.634) R5.2@40.717,-30.317
NetR6_1: R6.1 U3.1 | length 7.3
  Top Layer w0.2: U3.1 40.925,-40.6 R6.1 ; U3.1@38.308,-40.883 cw(c38.991,-41.566) 38.991,-40.6 cw(c38.991,-39.634) U3.1@38.308,-40.317 ; 39.733,-40.6 ccw(c39.733,-39.208) R6.1@40.717,-40.192 ; 40.215,-40.6 ccw(c40.215,-39.69) R6.1@40.859,-40.334 ; 40.336,-40.6 cw(c40.336,-41.139) R6.1@40.717,-40.758
NetR7_2: R7.2 U3.3 | length 6.6
  Top Layer w0.2: U3.3 R7.2 ; U3.3@38.308,-36.883 cw(c38.991,-37.566) 38.991,-36.6 cw(c38.991,-35.634) U3.3@38.308,-36.317 ; R7.2@40.717,-36.883 ccw(c40.034,-37.566) 40.034,-36.6 ccw(c40.034,-35.634) R7.2@40.717,-36.317
NetR8_2: R8.2 U3.12 | length 9.8
  Top Layer w0.2: R8.2@16.425,-34.925 18.35,-34.925 ; R8.2@16.791,-35.208 cw(c17.474,-35.891) 17.474,-34.925 cw(c17.474,-33.959) R8.2@16.791,-34.642 ; 18.132,-34.925 18.35,-34.925 ; 20.289,-33.411 ccw(c19.478,-32.6) U3.12@20.625,-32.6 ; 20.47,-33.23 cw(c21.025,-33.785) U3.12@21.025,-33 ; 20.631,-33.069 ccw(c20.161,-32.6) U3.12@20.825,-32.6 ; U3.12 21.1,-32.6 18.775,-34.925 18.35,-34.925
NetR9_1: R9.1 U3.10 | length 9.7
  Top Layer w0.2: R9.1 U3.10@21.25,-28.325 ; R9.1@16.791,-28.608 cw(c17.474,-29.291) 17.474,-28.325 cw(c17.474,-27.359) R9.1@16.791,-28.042 ; 19.395,-28.325 cw(c19.395,-30.23) U3.10@20.742,-28.883 ; 19.878,-28.325 cw(c19.878,-29.747) U3.10@20.884,-28.741 ; 20.361,-28.325 cw(c20.361,-29.264) U3.10@21.025,-28.6
NetR10_2: R10.2 U3.7 | length 7
  Top Layer w0.2: U3.7 37.55,-28.625 R10.2 ; U3.7@38.166,-28.459 ccw(c38.568,-28.057) 38.568,-28.625 ; U3.7@38.308,-28.883 cw(c38.93,-29.505) 38.93,-28.625 ; U3.7@38.308,-28.317 ccw(c39.051,-27.574) 39.051,-28.625 ; R10.2@40.717,-28.908 ccw(c40.034,-29.591) 40.034,-28.625 ccw(c40.034,-27.659) R10.2@40.717,-28.342
PA2: R1.2 U1.5 | length 38
  Top Layer w0.2: U1.5 67.646,-18.254 69.696,-18.254 69.825,-18.125 69.825,-10.5 v2(69.3,-9.975) ; v2@88.45,-13.65 R1.2 ; v2@88.637,-13.837 cw(c89.089,-14.289) 89.089,-13.65 ; v2@88.637,-13.413 ccw(c89.21,-12.84) 89.21,-13.65 ; R1.2@89.842,-13.933 ccw(c89.159,-14.616) 89.159,-13.65 ccw(c89.159,-12.684) R1.2@89.842,-13.367
  Bottom Layer w0.2: v2@69.3,-10.275 cw(c69.3,-10.999) 69.812,-10.487 cw(c70.324,-9.975) v2@69.6,-9.975 ; v2(69.3,-9.975) 70.925,-11.6 86.4,-11.6 v2(88.425,-13.625) ; v2@88.125,-13.625 ccw(c87.401,-13.625) 87.913,-13.113 ccw(c88.425,-12.601) v2@88.425,-13.325
PA3: C11.2 K2.1 U1.6 | length 53.1
  Top Layer w0.2: K2.1 52.119,5.456 52.275,5.3 52.275,-3.75 52.7,-4.175 C11.2 62.85,-5.8 63.175,-6.125 69.575,-6.125 70.279,-6.829 70.279,-12.176 ; K2.1@50.816,5.13 cw(c51.604,4.341) 51.604,5.456 cw(c51.604,6.572) K2.1@50.816,5.783 ; K2.1@50.957,4.988 cw(c52.087,3.858) 52.087,5.456 cw(c52.087,7.055) K2.1@50.957,5.925 ; C11.2@62.517,-4.458 ccw(c61.834,-5.141) 61.834,-4.175 ccw(c61.834,-3.209) C11.2@62.517,-3.892 ; C11.2@62.567,-4.458 cw(c61.884,-5.141) 62.85,-5.141 cw(c63.816,-5.141) C11.2@63.133,-4.458 ; U1.6 69.592,-19 70.279,-18.313 70.279,-12.176 ; 70.279,-12.012 70.279,-12.176
RESET: C1.2 P1.1 R4.1 U1.4 | length 24.5
  Top Layer w0.2: P1.1@59.537,-11.488 cw(c58.298,-12.727) 60.05,-12.727 cw(c61.802,-12.727) P1.1@60.563,-11.488 ; P1.1@59.678,-11.347 cw(c58.781,-12.244) 60.05,-12.244 cw(c61.319,-12.244) P1.1@60.422,-11.347 ; P1.1 60.05,-13.025 61.775,-14.75 C1.2 61.775,-17.65 R4.1 U1.4@67.525,-17.675 ; C1.2@61.492,-16.008 cw(c60.809,-16.691) 61.775,-16.691 cw(c62.741,-16.691) C1.2@62.058,-16.008 ; C1.2@61.492,-15.442 ccw(c60.809,-14.759) 61.775,-14.759 ccw(c62.741,-14.759) C1.2@62.058,-15.442 ; R4.1@61.517,-17.392 ccw(c60.895,-16.77) 61.775,-16.77 ; 61.775,-17.132 ccw(c62.343,-17.132) R4.1@61.941,-17.534 ; 61.775,-16.649 ccw(c62.826,-16.649) 62.083,-17.392 ccw(c62.766,-16.709) 62.766,-17.675 ccw(c62.766,-18.641) R4.1@62.083,-17.958
RX: P3.3 R2.2 U3.15 | length 34.2
  Top Layer w0.2: U3.15 24.625,-38.6 28.862,-34.363 P3.3 28.862,-15.063 29.975,-13.95 R2.2 ; U3.15@22.308,-38.883 cw(c22.991,-39.566) 22.991,-38.6 cw(c22.991,-37.634) U3.15@22.308,-38.317 ; R2.2@30.817,-14.233 ccw(c30.134,-14.916) 30.134,-13.95 ccw(c30.134,-12.984) R2.2@30.817,-13.667
SPI_CSN: P2.3 U1.14 | length 24.6
  Top Layer w0.2: U1.14 80.15,-19.65 83.65,-23.15 91.85,-23.15 92.563,-22.437 P2.3@92.563,-19.198 ; P2.3@92.351,-19.61 cw(c91.839,-20.122) 92.563,-20.122 cw(c93.287,-20.122) P2.3@92.775,-19.61
SPI_MISO: P2.6 U1.17 | length 19.1
  Top Layer w0.2: U1.17 80.8,-17.7 84.4,-21.3 88.225,-21.3 88.753,-20.772 P2.6@88.753,-19.198 ; P2.6@88.541,-19.61 cw(c88.029,-20.122) 88.753,-20.122 cw(c89.477,-20.122) P2.6@88.965,-19.61
SPI_MOSI: P2.5 U1.16 | length 21
  Top Layer w0.2: U1.16 80.55,-18.35 84.175,-21.975 89.525,-21.975 90.023,-21.477 P2.5@90.023,-19.198 ; P2.5@89.811,-19.61 cw(c89.299,-20.122) 90.023,-20.122 cw(c90.747,-20.122) P2.5@90.235,-19.61
SPI_SCK: P2.4 U1.15 | length 22.6
  Top Layer w0.2: U1.15 80.558,-19 84.033,-22.475 90.525,-22.475 91.293,-21.707 P2.4@91.293,-19.198 ; P2.4@91.081,-19.61 cw(c90.569,-20.122) 91.293,-20.122 cw(c92.017,-20.122) P2.4@91.505,-19.61
SWIM: P1.3 U1.3 | length 14.6
  Top Layer w0.2: P1.3@63.55,-11.488 cw(c62.312,-12.727) 64.063,-12.727 cw(c65.815,-12.727) P1.3@64.576,-11.488 ; P1.3@63.692,-11.347 cw(c62.795,-12.244) 64.063,-12.244 cw(c65.332,-12.244) P1.3@64.435,-11.347 ; P1.3 64.063,-12.862 63.5,-13.425 63.5,-16.175 64.375,-17.05 U1.3
TX: P3.2 R3.2 U3.16 | length 34.7
  Top Layer w0.2: U3.16 23.55,-40.6 29.475,-34.675 29.475,-23.218 P3.2 29.65,-20.607 29.65,-16.15 29.95,-15.85 R3.2 ; U3.16@22.308,-40.883 cw(c22.991,-41.566) 22.991,-40.6 cw(c22.991,-39.634) U3.16@22.308,-40.317 ; R3.2@30.817,-16.133 ccw(c30.134,-16.816) 30.134,-15.85 ccw(c30.134,-14.884) R3.2@30.817,-15.567
pads on no net: K1. K2. P6.3 U1.2 U1.9 U1.18 U1.19 U3.2 U3.4 U3.5 U3.13 U3.14
copper on no net: | length 205.6
  Top Layer w0.127: 1.456,-63.786 1.644,-63.786 ; 1.456,10.714 1.644,10.714 ; 1.464,-63.786 10.199,-63.786 ; 1.464,10.714 10.199,10.714 ; 1.644,-63.599 1.644,-27.126 ; 1.644,-25.946 1.644,10.526 ; 11.661,-70.516 11.849,-70.516 ; 11.849,-70.696 11.849,-65.436 ; 12.036,-70.516 60.159,-70.516 ; 63.539,-70.516 111.661,-70.516 111.849,-70.516 ; 111.849,-70.696 111.849,-65.436 ; 1.644,-63.786 1.456,-63.755 1.456,-63.818 1.644,-63.786 ; 1.644,10.714 1.456,10.745 1.456,10.682 1.644,10.714 ; 11.849,-70.516 11.661,-70.485 11.661,-70.547 11.849,-70.516 ; 111.849,-70.516 111.661,-70.485 111.661,-70.547 111.849,-70.516
  Mid-Layer 8 w0.127: -32.108,-38.943 -32.108,-35.465 ; -32.108,-35.787 -31.443,-35.658 ; -31.918,-37.333 -31.633,-37.784
  Mid-Layer 14 w0.064: 1.676,10.714 ccw(c1.644,10.714) 1.676,10.714 ; 10.293,-63.786 ccw(c10.261,-63.786) 10.293,-63.786 ; 10.293,10.714 ccw(c10.261,10.714) 10.293,10.714 ; 11.881,-65.374 ccw(c11.849,-65.374) 11.881,-65.374 ; 111.881,-70.516 ccw(c111.849,-70.516) 111.881,-70.516 ; 111.881,-65.374 ccw(c111.849,-65.374) 111.881,-65.374

## Polygon pours and split planes (outlines as drawn)
GND on Bottom Layer "Bottom Layer-GND" (solid, remove dead copper, pour order 1000): 11.875,10.7 56.85,10.7 56.85,7.725 96.825,7.725 96.825,10.7 111.85,10.7 111.85,-21.075 111.9,-21.125 111.85,-21.175 86.375,-21.175 45.125,-21.175 44.325,-21.975 42.975,-23.325 26.025,-23.325 11.85,-23.325 11.925,-23.25 11.925,10.7

## Keep-outs
Keep-Out Layer:
  circle w0.127: c16.849,4.214 r2.65
  circle w0.127: c106.849,4.214 r2.65
  circle w0.127: c106.849,-55.786 r2.65
  circle w0.127: c16.849,-55.786 r2.65
  lines w0.127: 11.849,-63.786 111.849,-63.786 111.849,10.714 96.849,10.714 96.849,7.714 56.849,7.714 56.849,10.714 11.849,10.714 11.849,-63.786

## Other copper
Top Layer:
  text "74.50" at 1.644,-27.036 h0.7
  text "100.00" at 61.849,-71.016 h0.7

## Silkscreen, mask and mechanical layers (free items; w line width, h text height)
Top Overlay:
  drawing of 346 lines, arcs and shapes, not listed
  text "2015-09-11   by ysh" at 25.825,-61.975 h0.7